# EAGLE board pololu-breakout-sheet (EAGLE 7.5.0)
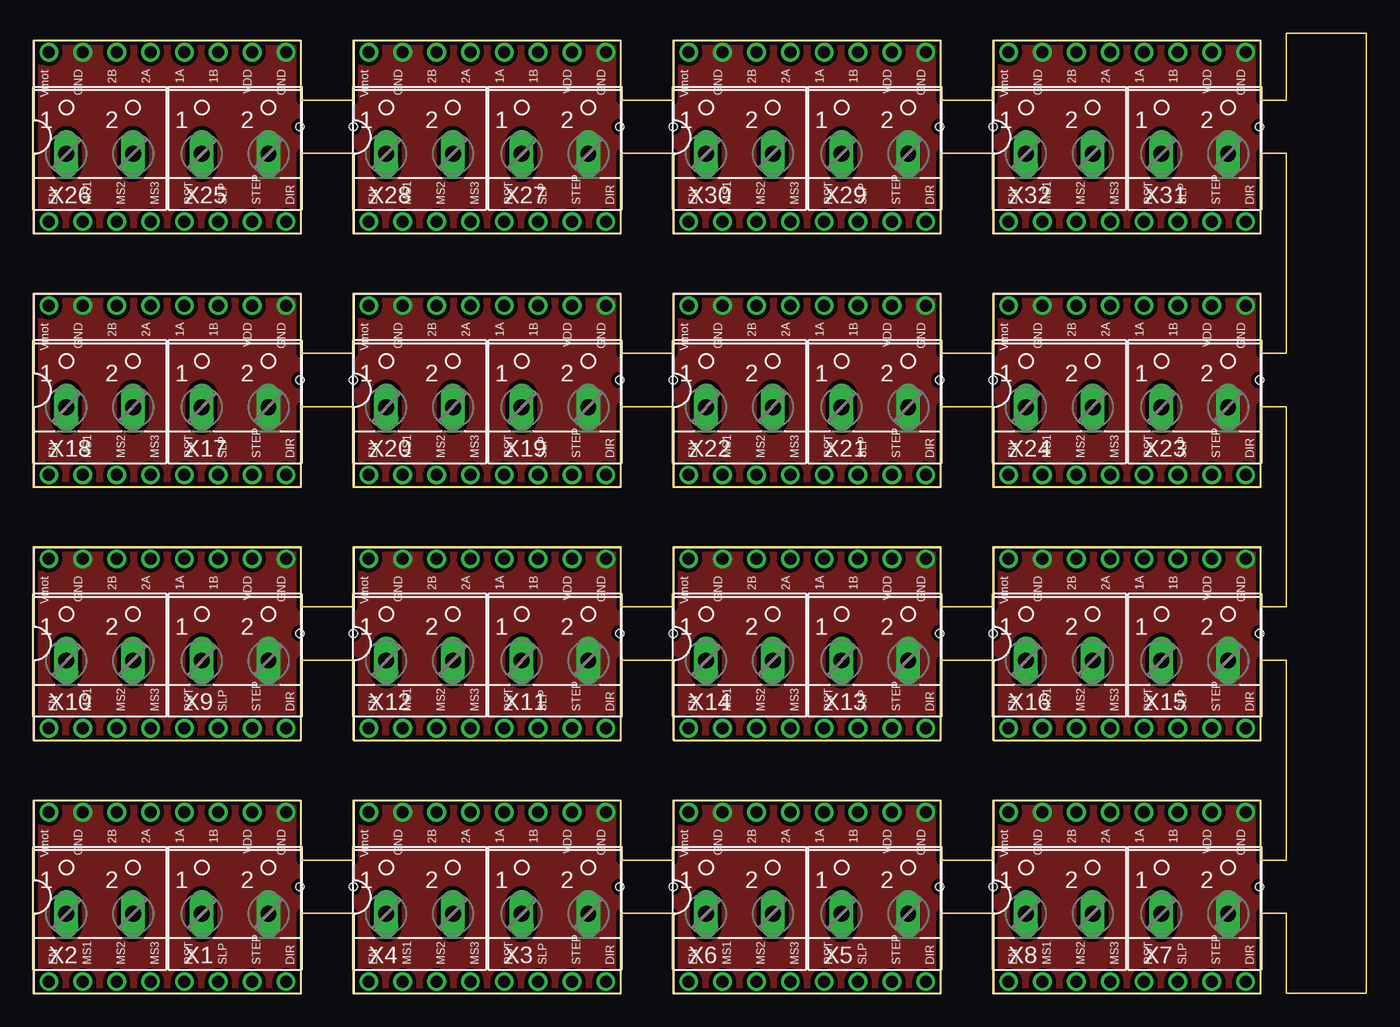
[diagram p0: board, top side]
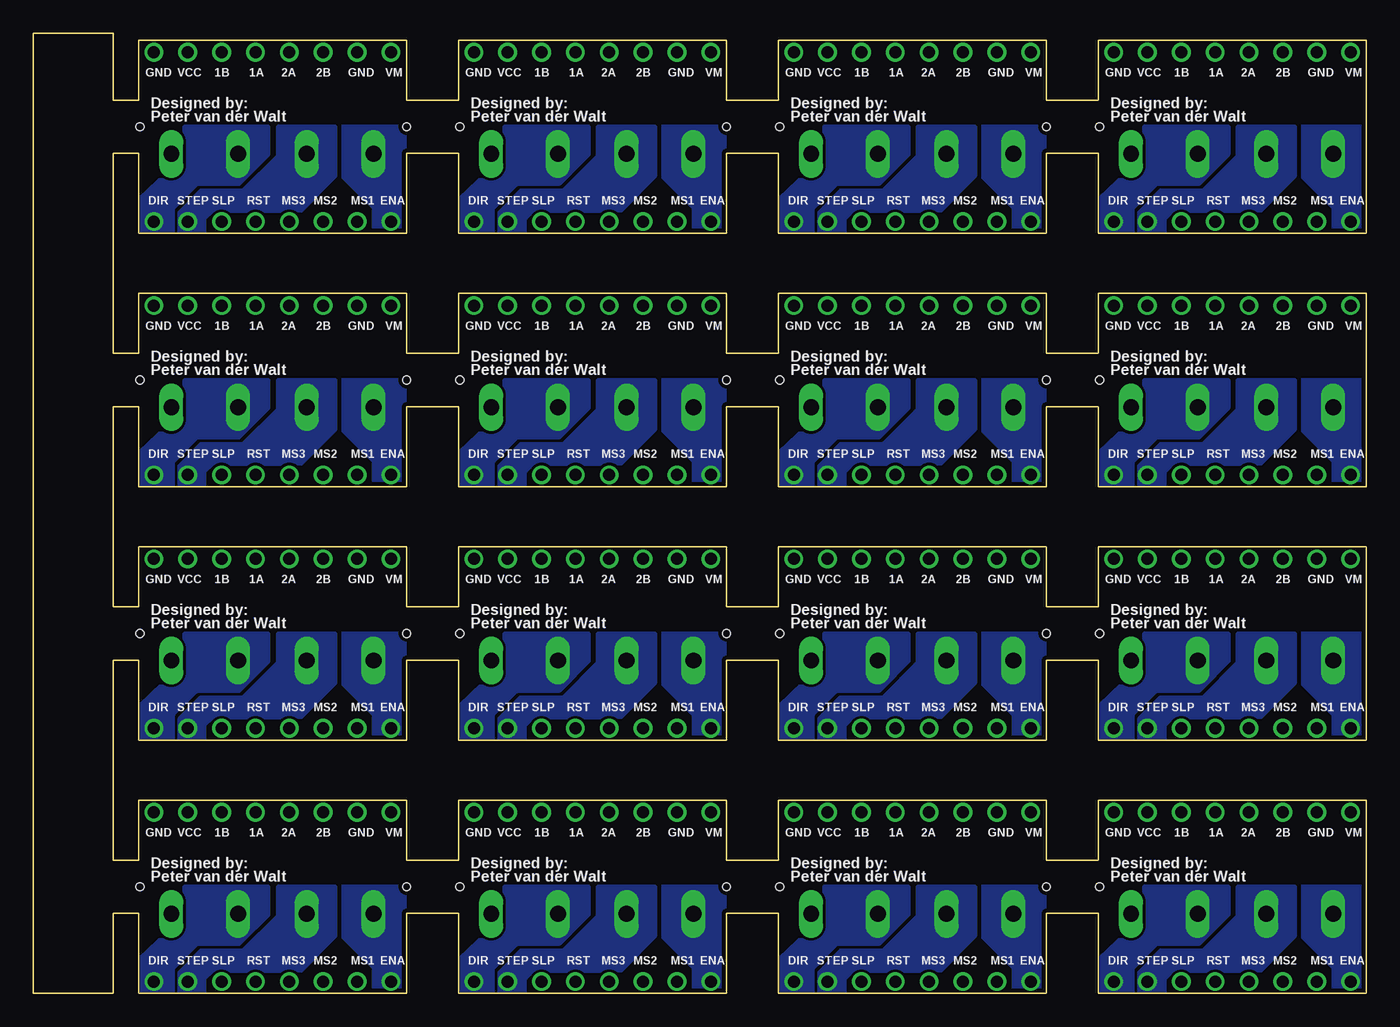
[diagram p1: board, bottom side, seen from below]

Size 100 x 72 mm. Coordinates in mm from the lower left corner, seen from the top.
Outline: 0,0 0,14.5 20.1,14.5 20.1,10 24,10 24,14.5 44.1,14.5 44.1,10 48,10 48,14.5 68.1,14.5 68.1,10 72,10 72,14.5 92.1,14.5 92.1,10 94,10 94,25 92.1,25 92.1,19 72,19 72,25 68.1,25 68.1,19 48,19 48,25 44.1,25 44.1,19 24,19 24,25 20.1,25 20.1,19 0,19 0,33.5 20.1,33.5 20.1,29 24,29 24,33.5 44.1,33.5 44.1,29 48,29 48,33.5 68.1,33.5 68.1,29 72,29 72,33.5 92.1,33.5 92.1,29 94,29 94,44 92.1,44 92.1,38 72,38 72,44 68.1,44 68.1,38 48,38 48,44 44.1,44 44.1,38 24,38 24,44 20.1,44 20.1,38 0,38 0,52.5 20.1,52.5 20.1,48 24,48 24,52.5 44.1,52.5 44.1,48 48,48 48,52.5 68.1,52.5 68.1,48 72,48 72,52.5 92.1,52.5 92.1,48 94,48 94,63 92.1,63 92.1,57 72,57 72,63 68.1,63 68.1,57 48,57 48,63 44.1,63 44.1,57 24,57 24,63 20.1,63 20.1,57 0,57 0,71.5 20.1,71.5 20.1,67 24,67 24,71.5 44.1,71.5 44.1,67 48,67 48,71.5 68.1,71.5 68.1,67 72,67 72,71.5 92.1,71.5 92.1,67 94,67 94,72 100,72 100,0 94,0 94,6 92.1,6 92.1,0 72,0 72,6 68.1,6 68.1,0 48,0 48,6 44.1,6 44.1,0 24,0 24,6 20.1,6 20.1,0 0,0
Copper layers (1*16): Top 0.035mm / dielectric 1.5mm / Bottom 0.035mm
Design rules "default *": minimum track width 10mil, minimum drill 24mil, track to track 8mil, track to pad 8mil, pad to pad 8mil, via to via 8mil, smd to smd 8mil, copper to edge 1mil, drill to drill 8mil, minimum pad ring 10mil, minimum via ring 8mil, stop-mask expansion 4mil, vias tented up to drill 0mil, thermal gap 10mil
Holes 0.6 mm at 20,8 24,8 44,8 48,8 68,8 72,8 92,8 92,27 72,27 68,27 48,27 44,27 20,27 24,27 20,46 24,46 44,46 68,46 92,46 72,46 72,65 92,65 68,65 48,65 44,65 24,65 20,65 48,46

## Footprints (pad centres in the part's own frame; a part is rotated, then mirrored left to right if it is on the bottom)
A4988BREAKOUT = drill 0.9: 1A 8.89,1.27; 1B 11.43,1.27; 2A 6.35,1.27; 2B 3.81,1.27; DIR 16.51,-11.43; EN -1.27,-11.43; GND 16.51,1.27; GND@0 1.27,1.27; MS1 1.27,-11.43; MS2 3.81,-11.43; MS3 6.35,-11.43; RST 8.89,-11.43; SLP 11.43,-11.43; STEP 13.97,-11.43; VDD 13.97,1.27; VMOT -1.27,1.27
W237-102 = drill 1.194 long: 1 -2.5,-1.27; 2 2.5,-1.27

## Placement (x,y rotation side)
U$1  POLOLU_A4983CARRIER  [A4988BREAKOUT]  2.44,12.31 0 top
U$2  POLOLU_A4983CARRIER  [A4988BREAKOUT]  26.44,12.31 0 top
U$3  POLOLU_A4983CARRIER  [A4988BREAKOUT]  50.44,12.31 0 top
U$4  POLOLU_A4983CARRIER  [A4988BREAKOUT]  74.44,12.31 0 top
U$5  POLOLU_A4983CARRIER  [A4988BREAKOUT]  2.44,31.31 0 top
U$6  POLOLU_A4983CARRIER  [A4988BREAKOUT]  26.44,31.31 0 top
U$7  POLOLU_A4983CARRIER  [A4988BREAKOUT]  50.44,31.31 0 top
U$8  POLOLU_A4983CARRIER  [A4988BREAKOUT]  74.44,31.31 0 top
U$9  POLOLU_A4983CARRIER  [A4988BREAKOUT]  2.44,50.31 0 top
U$10  POLOLU_A4983CARRIER  [A4988BREAKOUT]  26.44,50.31 0 top
U$11  POLOLU_A4983CARRIER  [A4988BREAKOUT]  50.44,50.31 0 top
U$12  POLOLU_A4983CARRIER  [A4988BREAKOUT]  74.44,50.31 0 top
U$13  POLOLU_A4983CARRIER  [A4988BREAKOUT]  2.44,69.31 0 top
U$14  POLOLU_A4983CARRIER  [A4988BREAKOUT]  26.44,69.31 0 top
U$15  POLOLU_A4983CARRIER  [A4988BREAKOUT]  50.44,69.31 0 top
U$16  POLOLU_A4983CARRIER  [A4988BREAKOUT]  74.44,69.31 0 top
X1  [W237-102]  15.14,7.23 0 top
X2  [W237-102]  4.98,7.23 0 top
X3  [W237-102]  39.14,7.23 0 top
X4  [W237-102]  28.98,7.23 0 top
X5  [W237-102]  63.14,7.23 0 top
X6  [W237-102]  52.98,7.23 0 top
X7  [W237-102]  87.14,7.23 0 top
X8  [W237-102]  76.98,7.23 0 top
X9  [W237-102]  15.14,26.23 0 top
X10  [W237-102]  4.98,26.23 0 top
X11  [W237-102]  39.14,26.23 0 top
X12  [W237-102]  28.98,26.23 0 top
X13  [W237-102]  63.14,26.23 0 top
X14  [W237-102]  52.98,26.23 0 top
X15  [W237-102]  87.14,26.23 0 top
X16  [W237-102]  76.98,26.23 0 top
X17  [W237-102]  15.14,45.23 0 top
X18  [W237-102]  4.98,45.23 0 top
X19  [W237-102]  39.14,45.23 0 top
X20  [W237-102]  28.98,45.23 0 top
X21  [W237-102]  63.14,45.23 0 top
X22  [W237-102]  52.98,45.23 0 top
X23  [W237-102]  87.14,45.23 0 top
X24  [W237-102]  76.98,45.23 0 top
X25  [W237-102]  15.14,64.23 0 top
X26  [W237-102]  4.98,64.23 0 top
X27  [W237-102]  39.14,64.23 0 top
X28  [W237-102]  28.98,64.23 0 top
X29  [W237-102]  63.14,64.23 0 top
X30  [W237-102]  52.98,64.23 0 top
X31  [W237-102]  87.14,64.23 0 top
X32  [W237-102]  76.98,64.23 0 top

## Library data of the parts
U$1-U$16 = RepRapjr
X1-X32 = con-wago-500; MPN: 237-102; OC_FARNELL: unknown; OC_NEWARK: 70K9898

## Nets
N$1: U$1.EN X2.1
N$2: U$1.STEP X2.2
N$3: U$1.DIR X1.1
N$4: U$1.GND U$1.GND@0 X1.2
N$5: U$2.EN X4.1
N$6: U$2.STEP X4.2
N$7: U$2.DIR X3.1
N$8: U$2.GND U$2.GND@0 X3.2
N$9: U$3.EN X6.1
N$10: U$3.STEP X6.2
N$11: U$3.DIR X5.1
N$12: U$3.GND U$3.GND@0 X5.2
N$13: U$4.EN X8.1
N$14: U$4.STEP X8.2
N$15: U$4.DIR X7.1
N$16: U$4.GND U$4.GND@0 X7.2
N$17: U$5.EN X10.1
N$18: U$5.STEP X10.2
N$19: U$5.DIR X9.1
N$20: U$5.GND U$5.GND@0 X9.2
N$21: U$6.EN X12.1
N$22: U$6.STEP X12.2
N$23: U$6.DIR X11.1
N$24: U$6.GND U$6.GND@0 X11.2
N$25: U$7.EN X14.1
N$26: U$7.STEP X14.2
N$27: U$7.DIR X13.1
N$28: U$7.GND U$7.GND@0 X13.2
N$29: U$8.EN X16.1
N$30: U$8.STEP X16.2
N$31: U$8.DIR X15.1
N$32: U$8.GND U$8.GND@0 X15.2
N$33: U$9.EN X18.1
N$34: U$9.STEP X18.2
N$35: U$9.DIR X17.1
N$36: U$9.GND U$9.GND@0 X17.2
N$37: U$10.EN X20.1
N$38: U$10.STEP X20.2
N$39: U$10.DIR X19.1
N$40: U$10.GND U$10.GND@0 X19.2
N$41: U$11.EN X22.1
N$42: U$11.STEP X22.2
N$43: U$11.DIR X21.1
N$44: U$11.GND U$11.GND@0 X21.2
N$45: U$12.EN X24.1
N$46: U$12.STEP X24.2
N$47: U$12.DIR X23.1
N$48: U$12.GND U$12.GND@0 X23.2
N$49: U$13.EN X26.1
N$50: U$13.STEP X26.2
N$51: U$13.DIR X25.1
N$52: U$13.GND U$13.GND@0 X25.2
N$53: U$14.EN X28.1
N$54: U$14.STEP X28.2
N$55: U$14.DIR X27.1
N$56: U$14.GND U$14.GND@0 X27.2
N$57: U$15.EN X30.1
N$58: U$15.STEP X30.2
N$59: U$15.DIR X29.1
N$60: U$15.GND U$15.GND@0 X29.2
N$61: U$16.EN X32.1
N$62: U$16.STEP X32.2
N$63: U$16.DIR X31.1
N$64: U$16.GND U$16.GND@0 X31.2
VDD: U$1.VDD
VDD1: U$2.VDD
VDD2: U$3.VDD
VDD3: U$4.VDD
VDD4: U$5.VDD
VDD5: U$6.VDD
VDD6: U$7.VDD
VDD7: U$8.VDD
VDD8: U$9.VDD
VDD9: U$10.VDD
VDD10: U$11.VDD
VDD11: U$12.VDD
VDD12: U$13.VDD
VDD13: U$14.VDD
VDD14: U$15.VDD
VDD15: U$16.VDD
VMOT: U$1.VMOT
VMOT1: U$2.VMOT
VMOT2: U$3.VMOT
VMOT3: U$4.VMOT
VMOT4: U$5.VMOT
VMOT5: U$6.VMOT
VMOT6: U$7.VMOT
VMOT7: U$8.VMOT
VMOT8: U$9.VMOT
VMOT9: U$10.VMOT
VMOT10: U$11.VMOT
VMOT11: U$12.VMOT
VMOT12: U$13.VMOT
VMOT13: U$14.VMOT
VMOT14: U$15.VMOT
VMOT15: U$16.VMOT

## Tracks (layer width: path | path; a pad name or v marks a point on that pad's centre or on a via)
N$1
  pour Bottom (isolate 0.305, rank 2, no thermals): 0.2,0.15 2.4,0.15 2.4,1.95 4.8,4.35 4.8,7.95 0.2,7.95
N$2
  pour Bottom (no thermals): 5.4,7.95 9.6,7.95 9.6,5.75 12.2,3.15 15.4,3.15 17,1.55 17,0.15 15.2,0.15 15.2,1.15 14.6,1.75 8,1.75 5.4,4.35
N$3
  pour Bottom (rank 2, no thermals): 10.4,7.95 10.4,5.95 12.6,3.75 15.6,3.75 17.6,1.75 17.6,0.15 20,0.15 20,2.55 16.6,5.75 16.6,7.95
N$4
  pour Top (isolate 0.305, no thermals): 0.2,14.35 20,14.35 20,0.15 0.2,0.15
N$5
  pour Bottom (isolate 0.305, rank 2, no thermals): 24.2,0.15 26.4,0.15 26.4,1.95 28.8,4.35 28.8,7.95 24.2,7.95
N$6
  pour Bottom (no thermals): 29.4,7.95 33.6,7.95 33.6,5.75 36.2,3.15 39.4,3.15 41,1.55 41,0.15 39.2,0.15 39.2,1.15 38.6,1.75 32,1.75 29.4,4.35
N$7
  pour Bottom (rank 2, no thermals): 34.4,7.95 34.4,5.95 36.6,3.75 39.6,3.75 41.6,1.75 41.6,0.15 44,0.15 44,2.55 40.6,5.75 40.6,7.95
N$8
  pour Top (isolate 0.305, no thermals): 24.2,14.35 44,14.35 44,0.15 24.2,0.15
N$9
  pour Bottom (isolate 0.305, rank 2, no thermals): 48.2,0.15 50.4,0.15 50.4,1.95 52.8,4.35 52.8,7.95 48.2,7.95
N$10
  pour Bottom (no thermals): 53.4,7.95 57.6,7.95 57.6,5.75 60.2,3.15 63.4,3.15 65,1.55 65,0.15 63.2,0.15 63.2,1.15 62.6,1.75 56,1.75 53.4,4.35
N$11
  pour Bottom (rank 2, no thermals): 58.4,7.95 58.4,5.95 60.6,3.75 63.6,3.75 65.6,1.75 65.6,0.15 68,0.15 68,2.55 64.6,5.75 64.6,7.95
N$12
  pour Top (isolate 0.305, no thermals): 48.2,14.35 68,14.35 68,0.15 48.2,0.15
N$13
  pour Bottom (isolate 0.305, rank 2, no thermals): 72.2,0.15 74.4,0.15 74.4,1.95 76.8,4.35 76.8,7.95 72.2,7.95
N$14
  pour Bottom (no thermals): 77.4,7.95 81.6,7.95 81.6,5.75 84.2,3.15 87.4,3.15 89,1.55 89,0.15 87.2,0.15 87.2,1.15 86.6,1.75 80,1.75 77.4,4.35
N$15
  pour Bottom (rank 2, no thermals): 82.4,7.95 82.4,5.95 84.6,3.75 87.6,3.75 89.6,1.75 89.6,0.15 92,0.15 92,2.55 88.6,5.75 88.6,7.95
N$16
  pour Top (isolate 0.305, no thermals): 72.2,14.35 92,14.35 92,0.15 72.2,0.15
N$17
  pour Bottom (isolate 0.305, rank 2, no thermals): 0.2,19.15 2.4,19.15 2.4,20.95 4.8,23.35 4.8,26.95 0.2,26.95
N$18
  pour Bottom (no thermals): 5.4,26.95 9.6,26.95 9.6,24.75 12.2,22.15 15.4,22.15 17,20.55 17,19.15 15.2,19.15 15.2,20.15 14.6,20.75 8,20.75 5.4,23.35
N$19
  pour Bottom (rank 2, no thermals): 10.4,26.95 10.4,24.95 12.6,22.75 15.6,22.75 17.6,20.75 17.6,19.15 20,19.15 20,21.55 16.6,24.75 16.6,26.95
N$20
  pour Top (isolate 0.305, no thermals): 0.2,33.35 20,33.35 20,19.15 0.2,19.15
N$21
  pour Bottom (isolate 0.305, rank 2, no thermals): 24.2,19.15 26.4,19.15 26.4,20.95 28.8,23.35 28.8,26.95 24.2,26.95
N$22
  pour Bottom (no thermals): 29.4,26.95 33.6,26.95 33.6,24.75 36.2,22.15 39.4,22.15 41,20.55 41,19.15 39.2,19.15 39.2,20.15 38.6,20.75 32,20.75 29.4,23.35
N$23
  pour Bottom (rank 2, no thermals): 34.4,26.95 34.4,24.95 36.6,22.75 39.6,22.75 41.6,20.75 41.6,19.15 44,19.15 44,21.55 40.6,24.75 40.6,26.95
N$24
  pour Top (isolate 0.305, no thermals): 24.2,33.35 44,33.35 44,19.15 24.2,19.15
N$25
  pour Bottom (isolate 0.305, rank 2, no thermals): 48.2,19.15 50.4,19.15 50.4,20.95 52.8,23.35 52.8,26.95 48.2,26.95
N$26
  pour Bottom (no thermals): 53.4,26.95 57.6,26.95 57.6,24.75 60.2,22.15 63.4,22.15 65,20.55 65,19.15 63.2,19.15 63.2,20.15 62.6,20.75 56,20.75 53.4,23.35
N$27
  pour Bottom (rank 2, no thermals): 58.4,26.95 58.4,24.95 60.6,22.75 63.6,22.75 65.6,20.75 65.6,19.15 68,19.15 68,21.55 64.6,24.75 64.6,26.95
N$28
  pour Top (isolate 0.305, no thermals): 48.2,33.35 68,33.35 68,19.15 48.2,19.15
N$29
  pour Bottom (isolate 0.305, rank 2, no thermals): 72.2,19.15 74.4,19.15 74.4,20.95 76.8,23.35 76.8,26.95 72.2,26.95
N$30
  pour Bottom (no thermals): 77.4,26.95 81.6,26.95 81.6,24.75 84.2,22.15 87.4,22.15 89,20.55 89,19.15 87.2,19.15 87.2,20.15 86.6,20.75 80,20.75 77.4,23.35
N$31
  pour Bottom (rank 2, no thermals): 82.4,26.95 82.4,24.95 84.6,22.75 87.6,22.75 89.6,20.75 89.6,19.15 92,19.15 92,21.55 88.6,24.75 88.6,26.95
N$32
  pour Top (isolate 0.305, no thermals): 72.2,33.35 92,33.35 92,19.15 72.2,19.15
N$33
  pour Bottom (isolate 0.305, rank 2, no thermals): 0.2,38.15 2.4,38.15 2.4,39.95 4.8,42.35 4.8,45.95 0.2,45.95
N$34
  pour Bottom (no thermals): 5.4,45.95 9.6,45.95 9.6,43.75 12.2,41.15 15.4,41.15 17,39.55 17,38.15 15.2,38.15 15.2,39.15 14.6,39.75 8,39.75 5.4,42.35
N$35
  pour Bottom (rank 2, no thermals): 10.4,45.95 10.4,43.95 12.6,41.75 15.6,41.75 17.6,39.75 17.6,38.15 20,38.15 20,40.55 16.6,43.75 16.6,45.95
N$36
  pour Top (isolate 0.305, no thermals): 0.2,52.35 20,52.35 20,38.15 0.2,38.15
N$37
  pour Bottom (isolate 0.305, rank 2, no thermals): 24.2,38.15 26.4,38.15 26.4,39.95 28.8,42.35 28.8,45.95 24.2,45.95
N$38
  pour Bottom (no thermals): 29.4,45.95 33.6,45.95 33.6,43.75 36.2,41.15 39.4,41.15 41,39.55 41,38.15 39.2,38.15 39.2,39.15 38.6,39.75 32,39.75 29.4,42.35
N$39
  pour Bottom (rank 2, no thermals): 34.4,45.95 34.4,43.95 36.6,41.75 39.6,41.75 41.6,39.75 41.6,38.15 44,38.15 44,40.55 40.6,43.75 40.6,45.95
N$40
  pour Top (isolate 0.305, no thermals): 24.2,52.35 44,52.35 44,38.15 24.2,38.15
N$41
  pour Bottom (isolate 0.305, rank 2, no thermals): 48.2,38.15 50.4,38.15 50.4,39.95 52.8,42.35 52.8,45.95 48.2,45.95
N$42
  pour Bottom (no thermals): 53.4,45.95 57.6,45.95 57.6,43.75 60.2,41.15 63.4,41.15 65,39.55 65,38.15 63.2,38.15 63.2,39.15 62.6,39.75 56,39.75 53.4,42.35
N$43
  pour Bottom (rank 2, no thermals): 58.4,45.95 58.4,43.95 60.6,41.75 63.6,41.75 65.6,39.75 65.6,38.15 68,38.15 68,40.55 64.6,43.75 64.6,45.95
N$44
  pour Top (isolate 0.305, no thermals): 48.2,52.35 68,52.35 68,38.15 48.2,38.15
N$45
  pour Bottom (isolate 0.305, rank 2, no thermals): 72.2,38.15 74.4,38.15 74.4,39.95 76.8,42.35 76.8,45.95 72.2,45.95
N$46
  pour Bottom (no thermals): 77.4,45.95 81.6,45.95 81.6,43.75 84.2,41.15 87.4,41.15 89,39.55 89,38.15 87.2,38.15 87.2,39.15 86.6,39.75 80,39.75 77.4,42.35
N$47
  pour Bottom (rank 2, no thermals): 82.4,45.95 82.4,43.95 84.6,41.75 87.6,41.75 89.6,39.75 89.6,38.15 92,38.15 92,40.55 88.6,43.75 88.6,45.95
N$48
  pour Top (isolate 0.305, no thermals): 72.2,52.35 92,52.35 92,38.15 72.2,38.15
N$49
  pour Bottom (isolate 0.305, rank 2, no thermals): 0.2,57.15 2.4,57.15 2.4,58.95 4.8,61.35 4.8,64.95 0.2,64.95
N$50
  pour Bottom (no thermals): 5.4,64.95 9.6,64.95 9.6,62.75 12.2,60.15 15.4,60.15 17,58.55 17,57.15 15.2,57.15 15.2,58.15 14.6,58.75 8,58.75 5.4,61.35
N$51
  pour Bottom (rank 2, no thermals): 10.4,64.95 10.4,62.95 12.6,60.75 15.6,60.75 17.6,58.75 17.6,57.15 20,57.15 20,59.55 16.6,62.75 16.6,64.95
N$52
  pour Top (isolate 0.305, no thermals): 0.2,71.35 20,71.35 20,57.15 0.2,57.15
N$53
  pour Bottom (isolate 0.305, rank 2, no thermals): 24.2,57.15 26.4,57.15 26.4,58.95 28.8,61.35 28.8,64.95 24.2,64.95
N$54
  pour Bottom (no thermals): 29.4,64.95 33.6,64.95 33.6,62.75 36.2,60.15 39.4,60.15 41,58.55 41,57.15 39.2,57.15 39.2,58.15 38.6,58.75 32,58.75 29.4,61.35
N$55
  pour Bottom (rank 2, no thermals): 34.4,64.95 34.4,62.95 36.6,60.75 39.6,60.75 41.6,58.75 41.6,57.15 44,57.15 44,59.55 40.6,62.75 40.6,64.95
N$56
  pour Top (isolate 0.305, no thermals): 24.2,71.35 44,71.35 44,57.15 24.2,57.15
N$57
  pour Bottom (isolate 0.305, rank 2, no thermals): 48.2,57.15 50.4,57.15 50.4,58.95 52.8,61.35 52.8,64.95 48.2,64.95
N$58
  pour Bottom (no thermals): 53.4,64.95 57.6,64.95 57.6,62.75 60.2,60.15 63.4,60.15 65,58.55 65,57.15 63.2,57.15 63.2,58.15 62.6,58.75 56,58.75 53.4,61.35
N$59
  pour Bottom (rank 2, no thermals): 58.4,64.95 58.4,62.95 60.6,60.75 63.6,60.75 65.6,58.75 65.6,57.15 68,57.15 68,59.55 64.6,62.75 64.6,64.95
N$60
  pour Top (isolate 0.305, no thermals): 48.2,71.35 68,71.35 68,57.15 48.2,57.15
N$61
  pour Bottom (isolate 0.305, rank 2, no thermals): 72.2,57.15 74.4,57.15 74.4,58.95 76.8,61.35 76.8,64.95 72.2,64.95
N$62
  pour Bottom (no thermals): 77.4,64.95 81.6,64.95 81.6,62.75 84.2,60.15 87.4,60.15 89,58.55 89,57.15 87.2,57.15 87.2,58.15 86.6,58.75 80,58.75 77.4,61.35
N$63
  pour Bottom (rank 2, no thermals): 82.4,64.95 82.4,62.95 84.6,60.75 87.6,60.75 89.6,58.75 89.6,57.15 92,57.15 92,59.55 88.6,62.75 88.6,64.95
N$64
  pour Top (isolate 0.305, no thermals): 72.2,71.35 92,71.35 92,57.15 72.2,57.15

## Text on the board
bPlace: VM | GND | 2B | 2A | 1A | 1B | VCC | GND | VM | GND | 2B | 2A | 1A | 1B | VCC | GND | VM | GND | 2B | 2A | 1A | 1B | VCC | GND | VM | GND | 2B | 2A | 1A | 1B | VCC | GND | Designed by: | Designed by: | Designed by: | Designed by: | Peter van der Walt | Peter van der Walt | Peter van der Walt | Peter van der Walt | ENA | MS1 | MS2 | MS3 | RST | SLP | STEP | DIR | ENA | MS1 | MS2 | MS3 | RST | SLP | STEP | DIR | ENA | MS1 | MS2 | MS3 | RST | SLP | STEP | DIR | ENA | MS1 | MS2 | MS3 | RST | SLP | STEP | DIR | VM | GND | 2B | 2A | 1A | 1B | VCC | GND | VM | GND | 2B | 2A | 1A | 1B | VCC | GND | VM | GND | 2B | 2A | 1A | 1B | VCC | GND | VM | GND | 2B | 2A | 1A | 1B | VCC | GND | Designed by: | Designed by: | Designed by: | Designed by: | Peter van der Walt | Peter van der Walt | Peter van der Walt | Peter van der Walt | ENA | MS1 | MS2 | MS3 | RST | SLP | STEP | DIR | ENA | MS1 | MS2 | MS3 | RST | SLP | STEP | DIR | ENA | MS1 | MS2 | MS3 | RST | SLP | STEP | DIR | ENA | MS1 | MS2 | MS3 | RST | SLP | STEP | DIR | VM | GND | 2B | 2A | 1A | 1B | VCC | GND | VM | GND | 2B | 2A | 1A | 1B | VCC | GND | VM | GND | 2B | 2A | 1A | 1B | VCC | GND | VM | GND | 2B | 2A | 1A | 1B | VCC | GND | Designed by: | Designed by: | Designed by: | Designed by: | Peter van der Walt | Peter van der Walt | Peter van der Walt | Peter van der Walt | ENA | MS1 | MS2 | MS3 | RST | SLP | STEP | DIR | ENA | MS1 | MS2 | MS3 | RST | SLP | STEP | DIR | ENA | MS1 | MS2 | MS3 | RST | SLP | STEP | DIR | ENA | MS1 | MS2 | MS3 | RST | SLP | STEP | DIR | VM | GND | 2B | 2A | 1A | 1B | VCC | GND | VM | GND | 2B | 2A | 1A | 1B | VCC | GND | VM | GND | 2B | 2A | 1A | 1B | VCC | GND | VM | GND | 2B | 2A | 1A | 1B | VCC | GND | Designed by: | Designed by: | Designed by: | Designed by: | Peter van der Walt | Peter van der Walt | Peter van der Walt | Peter van der Walt | ENA | MS1 | MS2 | MS3 | RST | SLP | STEP | DIR | ENA | MS1 | MS2 | MS3 | RST | SLP | STEP | DIR | ENA | MS1 | MS2 | MS3 | RST | SLP | STEP | DIR | ENA | MS1 | MS2 | MS3 | RST | SLP | STEP | DIR
routoute: ENA | STP | DIR | GND | ENA | STP | DIR | GND | ENA | STP | DIR | GND | ENA | STP | DIR | GND | EN | MS1 | MS2 | MS3 | RST | SLP | STEP | DIR | EN | MS1 | MS2 | MS3 | RST | SLP | STEP | DIR | EN | MS1 | MS2 | MS3 | RST | SLP | STEP | DIR | EN | MS1 | MS2 | MS3 | RST | SLP | STEP | DIR | ENA | STP | DIR | GND | ENA | STP | DIR | GND | ENA | STP | DIR | GND | ENA | STP | DIR | GND | EN | MS1 | MS2 | MS3 | RST | SLP | STEP | DIR | EN | MS1 | MS2 | MS3 | RST | SLP | STEP | DIR | EN | MS1 | MS2 | MS3 | RST | SLP | STEP | DIR | EN | MS1 | MS2 | MS3 | RST | SLP | STEP | DIR | ENA | STP | DIR | GND | ENA | STP | DIR | GND | ENA | STP | DIR | GND | ENA | STP | DIR | GND | EN | MS1 | MS2 | MS3 | RST | SLP | STEP | DIR | EN | MS1 | MS2 | MS3 | RST | SLP | STEP | DIR | EN | MS1 | MS2 | MS3 | RST | SLP | STEP | DIR | EN | MS1 | MS2 | MS3 | RST | SLP | STEP | DIR | ENA | STP | DIR | GND | ENA | STP | DIR | GND | ENA | STP | DIR | GND | ENA | STP | DIR | GND | EN | MS1 | MS2 | MS3 | RST | SLP | STEP | DIR | EN | MS1 | MS2 | MS3 | RST | SLP | STEP | DIR | EN | MS1 | MS2 | MS3 | RST | SLP | STEP | DIR | EN | MS1 | MS2 | MS3 | RST | SLP | STEP | DIR